# EAGLE board SHTC3 Breakout (EAGLE 7.5.0)
REVISION: A
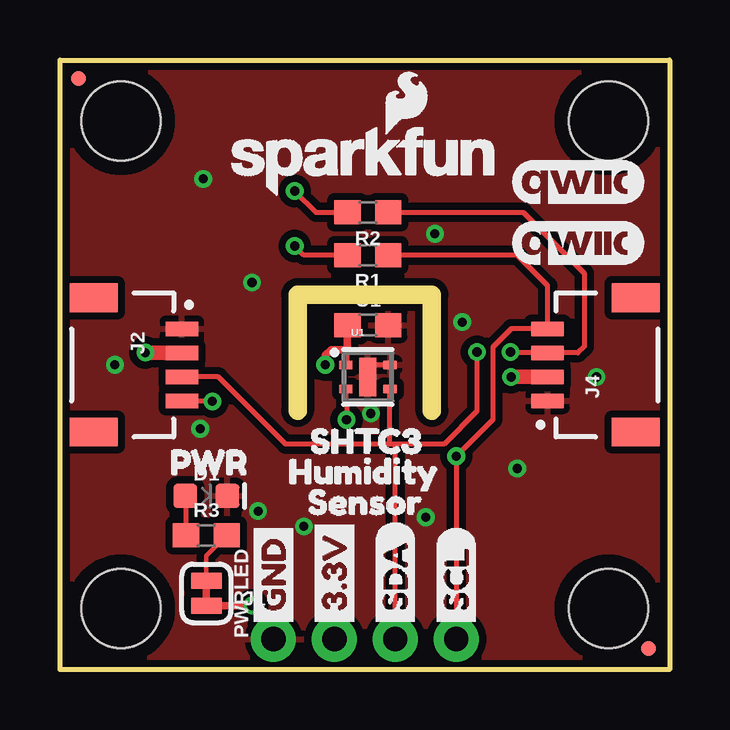
[diagram p0: board, top side]
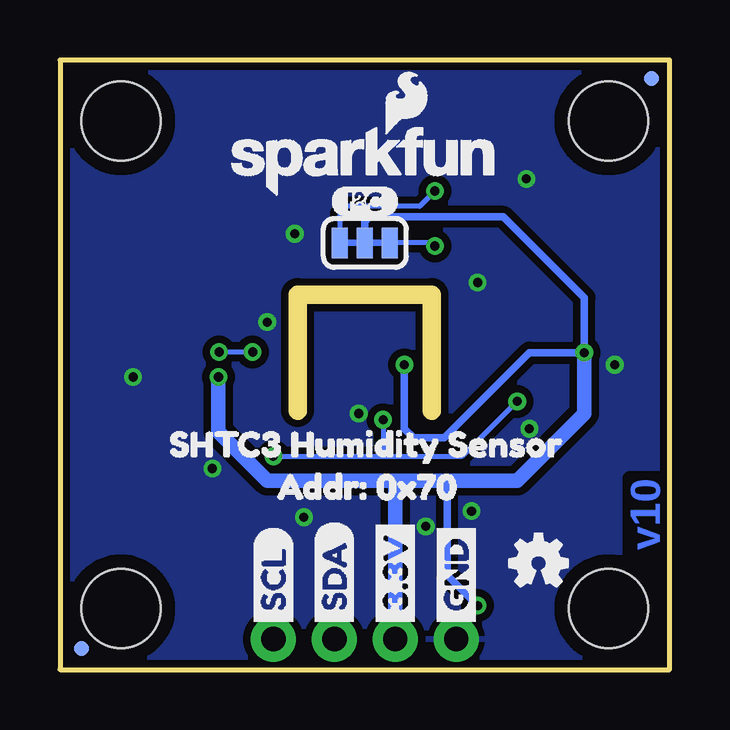
[diagram p1: board, bottom side, seen from below]

Size 25.4 x 25.4 mm. Coordinates in mm from the lower left corner, seen from the top.
Outline: 0,0 0,25.4 25.4,25.4 25.4,0 0,0
Copper layers (1*16): Top 0.035mm / dielectric 1.5mm / Bottom 0.035mm
Design rules "SparkFun-2-layer-TIGHT": minimum track width 7mil, minimum drill 15mil, track to track 7mil, track to pad 7mil, pad to pad 7mil, via to via 7mil, smd to smd 7mil, copper to edge 7mil, drill to drill 7mil, minimum pad ring 7mil, minimum via ring 7mil, stop-mask expansion 4mil, vias tented up to drill 25mil, thermal gap 10mil
Net classes: 1 power: width 0.203 mm
tRestrict: 3 lines
bRestrict: 3 lines
Milling: 3 lines

## Footprints (pad centres in the part's own frame; a part is rotated, then mirrored left to right if it is on the bottom)
0603 = smd 1.1 x 1: 1 -0.85,0; 2 0.85,0
LED-0603 = smd 1 x 1: A -0.877,0; C 0.877,0
SMT-JUMPER_3_2-NC_TRACE_SILK = smd 0.66 x 1.27: 1 -1.041,0; 2 0,0; 3 1.041,0
1X04_NO_SILK = drill 1.016 pad 1.88: 1 0,0; 2 2.54,0; 3 5.08,0; 4 7.62,0
JST04_1MM_RA = smd 0.6 x 1.35: 1 -1.5,0; 2 -0.5,0; 3 0.5,0; 4 1.5,0 | smd 1.2 x 2: NC1 2.8,-3.675; NC2 -2.8,-3.675
MICRO-FIDUCIAL = smd 0.635 x 0.635: 1 0,0
STAND-OFF = hole 3.302: 0,0
SMT-JUMPER_2_NC_TRACE_SILK = smd 0.66 x 1.27: 1 -0.521,0; 2 0.521,0
SHTC3 = smd 0.55 x 0.35: 1 -0.925,0.5; 2 -0.925,-0.5; 3 0.925,-0.5; 4 0.925,0.5 | smd 0.7 x 1.6: 5 0,0

## Placement (x,y rotation side)
C1  0.1uF  [0603]  12.83,14.35 0 top
D1  RED  [LED-0603]  6.1,7.24 0 top
FRAME1  FRAME-LETTER  [CREATIVE_COMMONS]  -12.7,-19.05 0 top  (outside the outline)
I2C  JUMPER-SMT_3_2-NC_TRACE_SILK  [SMT-JUMPER_3_2-NC_TRACE_SILK]  12.7,17.78 0 bottom
J1  [1X04_NO_SILK]  8.89,1.27 0 top
J2  QWIIC_RIGHT_ANGLE  [JST04_1MM_RA]  5.08,12.7 270 top
J4  QWIIC_RIGHT_ANGLE  [JST04_1MM_RA]  20.32,12.7 90 top
JP1  FIDUCIALUFIDUCIAL  [MICRO-FIDUCIAL]  0.76,24.64 0 bottom
JP2  FIDUCIALUFIDUCIAL  [MICRO-FIDUCIAL]  24.51,0.89 0 top
JP3  STAND-OFF  [STAND-OFF]  2.54,22.86 0 top
JP4  STAND-OFF  [STAND-OFF]  22.86,22.86 0 top
JP5  FIDUCIALUFIDUCIAL  [MICRO-FIDUCIAL]  24.51,0.89 0 bottom
JP6  FIDUCIALUFIDUCIAL  [MICRO-FIDUCIAL]  0.76,24.64 0 top
JP7  STAND-OFF  [STAND-OFF]  2.54,2.54 0 top
JP8  STAND-OFF  [STAND-OFF]  22.86,2.54 0 top
LOGO1  OSHW-LOGOMINI  [OSHW-LOGO-MINI]  5.46,4.45 0 bottom
LOGO2  SFE_LOGO_NAME_FLAME.1_INCH  [SFE_LOGO_NAME_FLAME_.1]  12.7,21.21 0 top
LOGO3  SFE_LOGO_NAME_FLAME.1_INCH  [SFE_LOGO_NAME_FLAME_.1]  12.7,21.21 0 bottom
LOGO4  REVISION  [REVISION]  -1.27,-21.59 0 top  (outside the outline)
PWRLED  JUMPER-SMT_2_NC_TRACE_SILK  [SMT-JUMPER_2_NC_TRACE_SILK]  6.1,3.17 270 top
R1  2.2k  [0603]  12.83,17.27 180 top
R2  2.2k  [0603]  12.83,19.05 180 top
R3  1k  [0603]  6.1,5.59 0 top
U1  SHTC3  [SHTC3]  12.83,12.19 0 top
U$1  [ADDR#_0X700]  17.27,7.62 0 bottom
U$2  [PWR_TO]  3.68,8.64 0 top
U$3  [GND1]  8.89,1.52 90 bottom
U$4  [3#3V2]  11.43,1.52 90 bottom
U$5  [SDA8]  13.97,1.52 90 bottom
U$6  [SCL9]  16.51,1.52 90 bottom
U$7  [SHTC3_HUMIDITY_SENSOR2]  21.72,9.4 0 bottom
U$8  [_SHTC31]  9.14,9.53 0 top
U$9  [I_SUPER2_C-()-03]  14.12,19.51 0 bottom
U$10  [HUMIDITY2]  8.64,8.26 0 top
U$11  [QWIIC_5.5MM]  21.59,17.78 0 top
U$12  [SENSOR0]  9.4,6.99 0 top
U$13  [QWIIC_5.5MM]  21.59,17.78 0 top
U$14  [QWIIC_5.5MM]  21.59,17.78 0 top
U$15  [QWIIC_5.5MM]  21.59,20.32 0 top
U$21  [3#3V2]  11.43,1.52 90 top
U$22  [GND1]  8.89,1.52 90 top
U$26  [SCL9]  16.51,1.52 90 top
U$27  [SDA8]  13.97,1.52 90 top

## Library data of the parts
C1 = SparkFun-Capacitors; PROD_ID: CAP-00810
D1 = SparkFun-LED; PROD_ID: DIO-00819
FRAME1 LOGO1-LOGO4 U$11 U$13-U$15 = SparkFun-Aesthetics
I2C PWRLED = SparkFun-Jumpers
J1 = SparkFun-Connectors; PROD_ID: CONN-09696
J2 J4 = SparkFun-Connectors; PROD_ID: CONN-13694
JP1-JP8 = SparkFun
R1 R2 = SparkFun-Resistors; PROD_ID: RES-08272
R3 = SparkFun-Resistors; PROD_ID: RES-07856
U1 = SparkFun-Sensors; PROD_ID: IC-14840
U$1 U$8 U$10 U$12 = buzzard_labels
U$2 = SparkFun-Buzzard
U$3-U$6 U$21 U$22 U$26 U$27 = Labels-0_04
U$7 = buzzard_labels (3)
U$9 = Labels

## Nets
3.3V: C1.1 I2C.2 J1.2 J2.2 J4.2 PWRLED.2 U1.1
GND: C1.2 D1.C J1.1 J2.1 J4.1 U1.4 U1.5
N$1: I2C.3 R1.2
N$2: I2C.1 R2.2
N$3: D1.A R3.1
N$4: PWRLED.1 R3.2
SCL: J1.4 J2.4 J4.4 R1.1 U1.2
SDA: J1.3 J2.3 J4.3 R2.1 U1.3

## Tracks (layer width: path | path; a pad name or v marks a point on that pad's centre or on a via)
3.3V  (via drill 0.38)
  Top 0.305: J4.2 | J2.2 | v11.05,12.7 v11.06,12.69 11.06,13.09 11.3,13.34 11.91,13.34 | C1.1 11.98,13.4 11.91,13.34 | 11.91,13.34 11.9,13.33 U1.1 | v8,2.67 7.75,2.67 7.73,2.65 PWRLED.2
  Top 0.61: v18.8,12.19 J4.2 | v3.56,13.21 J2.2
  Bottom 0.305: v11.05,12.7 11.05,10.03 10.67,9.65 9.4,9.65 5.84,13.21 v3.56,13.21 3.56,15.49 6.92,18.86 12.51,18.86 12.7,18.67 I2C.2 | v8,2.67 9.27,3.94 9.27,7.87
  Bottom 0.61: 11.43,7.87 9.27,7.87 6.35,7.87 3.56,10.67 v3.56,13.21 | 11.43,7.87 16.76,7.87 18.8,9.91 v18.8,12.19 | 11.43,7.87 J1.2
GND  (via drill 0.38)
  Top 0.178: U1.4 12.71,12.69 12.7,12.7 12.7,12.32 U1.5
  other vias: 15.24,6.35 19.05,8.38 15.62,18.16 2.29,12.7 16.76,14.48 5.97,20.45 5.84,10.03 22.35,12.19 8.26,6.6 8,16.13 12.95,10.67 10.16,5.97
  pour Bottom (isolate 0.305): 0,0 0,25.4 25.4,25.4 25.4,0
  pour Top (isolate 0.305): 0,0 0,25.4 25.4,25.4 25.4,0
N$1  (via drill 0.38)
  Top 0.203: R1.2 10.16,17.27 v9.78,17.65
  Bottom 0.203: v9.78,17.65 9.91,17.78 I2C.3
N$2  (via drill 0.38)
  Top 0.203: R2.2 10.67,19.05 v9.78,19.94
  Bottom 0.203: v9.78,19.94 10.41,19.3 13.46,19.3 13.74,19.02 I2C.1
N$3
  Top 0.203: 5.25,7.21 R3.1
  Top 0.254: D1.A 5.25,7.21
N$4
  Top 0.178: PWRLED.1 6.1,4.74 R3.2
SCL  (via drill 0.38)
  Top 0.203: v6.35,11.18 5.1,11.18 | U1.2 11.9,11.09 11.94,11.05 v11.94,10.41 | R1.1 19.05,17.27 20.32,16 J4.4 18.8,14.2 18.03,13.44 18.03,10.41 v16.51,8.89 J1.4
  Top 0.254: 5.1,11.18 J2.4
  Bottom 0.203: v6.35,11.18 8.64,8.89 11.94,8.89 | v16.51,8.89 11.94,8.89 | v11.94,10.41 11.94,8.89
SDA  (via drill 0.38)
  Top 0.203: J2.3 6.6,12.19 9.4,9.4 13.72,9.4 | v17.37,13.23 17.37,10.77 16,9.4 13.97,9.4 | 13.97,9.4 13.72,9.4 | U1.3 13.72,11.66 13.72,9.4 | R2.1 19.3,19.05 21.84,16.51 21.84,13.46 21.58,13.2 J4.3 18.8,13.2 v18.77,13.23 | J1.3 13.97,9.4
  Top 0.254: J2.3
  Bottom 0.203: v18.77,13.23 v17.37,13.23

## Text on the board
Bottom: v10
Measures: Dimensions in inches
tDocu: Bryan Hoff | Andy England